# EAGLE board 74hc165 extension board (EAGLE 9.2.0)
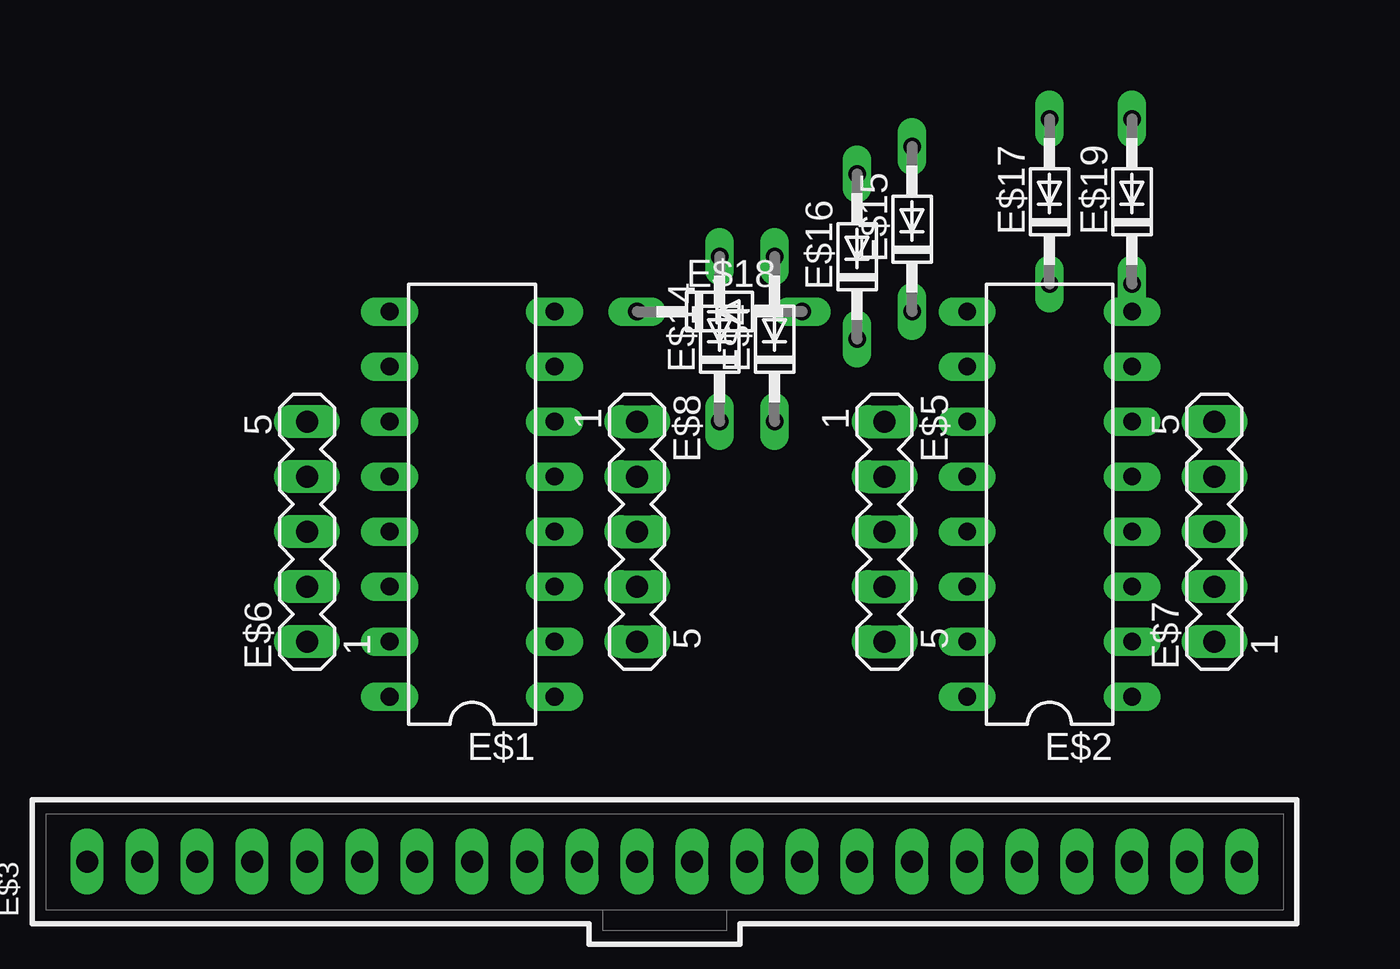
[diagram p0: board, top side]
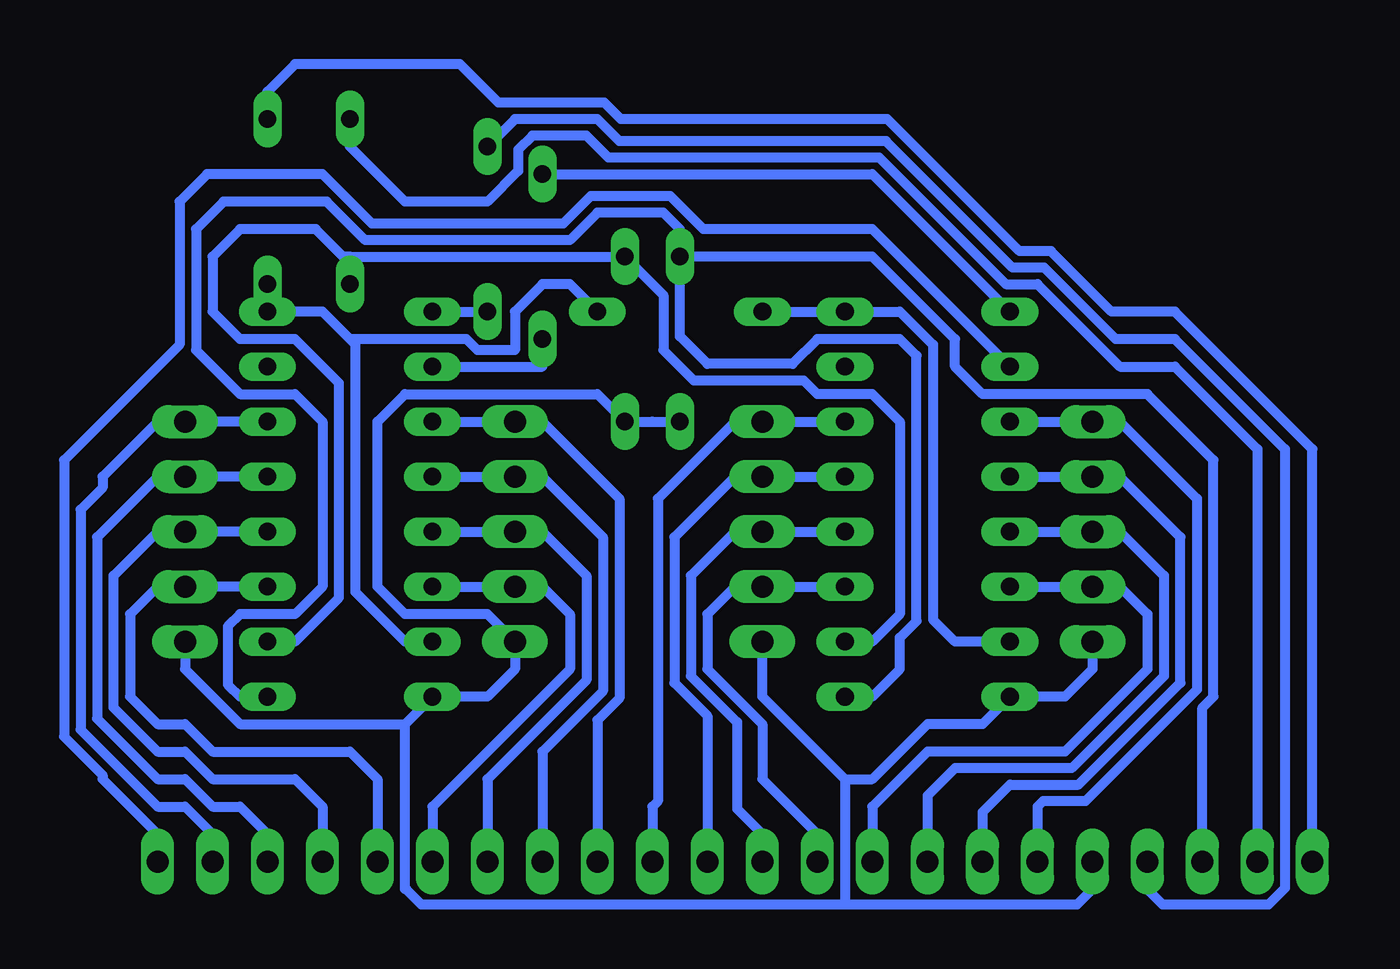
[diagram p1: board, bottom side, seen from below]

No outline drawn. Coordinates in mm, seen from the top.
Copper layers (1*16): Top 0.035mm / dielectric 1.5mm / Bottom 0.035mm
Design rules "default": minimum track width 6mil, minimum drill 0.35mm, track to track 6mil, track to pad 6mil, pad to pad 6mil, via to via 6mil, smd to smd 6mil, copper to edge 40mil, drill to drill 6mil, minimum pad ring 10mil, minimum via ring 8mil, stop-mask expansion 4mil, vias tented up to drill 0mil, thermal gap 10mil

## Footprints (pad centres in the part's own frame; a part is rotated, then mirrored left to right if it is on the bottom)
DIL16 = drill 0.813 long: 1 -8.89,-3.81; 2 -6.35,-3.81; 3 -3.81,-3.81; 4 -1.27,-3.81; 5 1.27,-3.81; 6 3.81,-3.81; 7 6.35,-3.81; 8 8.89,-3.81; 9 8.89,3.81; 10 6.35,3.81; 11 3.81,3.81; 12 1.27,3.81; 13 -1.27,3.81; 14 -3.81,3.81; 15 -6.35,3.81; 16 -8.89,3.81
70543-22 = drill 1.016 long: 1 -26.67,0; 2 -24.13,0; 3 -21.59,0; 4 -19.05,0; 5 -16.51,0; 6 -13.97,0; 7 -11.43,0; 8 -8.89,0; 9 -6.35,0; 10 -3.81,0; 11 -1.27,0; 12 1.27,0; 13 3.81,0; 14 6.35,0; 15 8.89,0; 16 11.43,0; 17 13.97,0; 18 16.51,0; 19 19.05,0; 20 21.59,0; 21 24.13,0; 22 26.67,0
DO34-7 = drill 0.813 long: A 3.81,0; C -3.81,0
MA05-1 = drill 1.016 long: 1 -5.08,0; 2 -2.54,0; 3 0,0; 4 2.54,0; 5 5.08,0

## Placement (x,y rotation side)
E$1  [DIL16]  35.56,57.15 90 top
E$2  [DIL16]  62.23,57.15 90 top
E$3  [70543-22]  44.45,40.64 0 top
E$4  [DO34-7]  49.53,64.77 90 top
E$5  [MA05-1]  54.61,55.88 270 top
E$6  [MA05-1]  27.94,55.88 90 top
E$7  [MA05-1]  69.85,55.88 90 top
E$8  [MA05-1]  43.18,55.88 270 top
E$14  [DO34-7]  46.99,64.77 90 top
E$15  [DO34-7]  55.88,69.85 90 top
E$16  [DO34-7]  53.34,68.58 90 top
E$17  [DO34-7]  62.23,71.12 90 top
E$18  [DO34-7]  46.99,66.04 0 top
E$19  [DO34-7]  66.04,71.12 90 top

## Library data of the parts
E$1 E$2 = 74xx-eu
E$3 = con-molex
E$4 E$14-E$19 = diode
E$5-E$8 = con-lstb

## Nets
S$1: E$2.6 E$3.21 E$7.5
S$2: E$2.5 E$3.20 E$7.4
S$3: E$2.4 E$3.19 E$7.3
S$4: E$2.3 E$3.18 E$7.2
S$5: E$2.14 E$3.17 E$5.4
S$6: E$2.13 E$3.16 E$5.3
S$7: E$2.12 E$3.15 E$5.2
S$8: E$2.11 E$3.14 E$5.1
S$9: E$1.6 E$3.13 E$8.1
S$10: E$1.5 E$3.12 E$8.2
S$11: E$1.4 E$3.11 E$8.3
S$12: E$1.3 E$3.10 E$8.4
S$13: E$1.14 E$3.9 E$6.2
S$14: E$1.13 E$3.8 E$6.3
S$15: E$1.12 E$3.7 E$6.4
S$16: E$1.11 E$3.6 E$6.5
S$17: E$1.8 E$1.15 E$18.C
S$18: E$2.8 E$2.15 E$18.A E$19.C
S$19: E$1.16 E$2.16 E$3.5 E$4.C E$5.5 E$6.1 E$7.1 E$8.5 E$14.C
S$20: E$1.2 E$2.2 E$4.A E$17.C
S$21: E$1.1 E$2.1 E$3.3 E$14.A
S$22: E$1.10 E$3.22
S$23: E$2.10 E$16.C
S$24: E$1.9 E$16.A
S$25: E$2.9 E$15.C
S$26: E$3.4 E$15.A
S$27: E$3.2 E$17.A
S$28: E$3.1 E$19.A

## Tracks (layer width: path | path; a pad name or v marks a point on that pad's centre or on a via)
S$1
  Bottom 0.457: E$2.6 E$7.5 71.12,60.96 73.66,58.42 73.66,57.91 74.68,56.9 74.68,46.74 71.12,43.18 69.85,43.18 68.58,41.91 E$3.21
S$2
  Bottom 0.457: E$2.5 E$7.4 71.12,58.42 73.91,55.63 73.91,47.24 71.12,44.45 69.85,44.45 68.58,43.18 67.31,43.18 66.04,41.91 E$3.20
S$3
  Bottom 0.457: E$2.4 E$7.3 71.12,55.88 73.15,53.85 73.15,47.75 71.12,45.72 69.85,45.72 68.58,44.45 64.77,44.45 63.5,43.18 E$3.19
S$4
  Bottom 0.457: E$2.3 E$7.2 71.12,53.34 72.39,52.07 72.39,48.26 71.12,46.99 69.85,46.99 68.58,45.72 62.23,45.72 60.96,44.45 E$3.18
S$5
  Bottom 0.457: E$2.14 E$5.4 53.34,53.34 52.07,52.07 52.07,49.53 58.42,43.18 E$3.17
S$6
  Bottom 0.457: E$2.13 E$5.3 53.34,55.88 51.31,53.85 51.31,49.02 55.88,44.45 E$3.16
S$7
  Bottom 0.457: E$2.12 E$5.2 53.34,58.42 50.55,55.63 50.55,48.51 53.34,45.72 E$3.15
S$8
  Bottom 0.457: E$2.11 E$5.1 53.34,60.96 49.78,57.4 49.78,48.2 50.8,47.18 E$3.14
S$9
  Bottom 0.457: E$1.6 E$8.1 44.45,60.96 48.01,57.4 48.01,43.43 48.26,43.18 E$3.13
S$10
  Bottom 0.457: E$1.5 E$8.2 44.45,58.42 47.24,55.63 47.24,48.9 45.72,47.38 E$3.12
S$11
  Bottom 0.457: E$1.4 E$8.3 44.45,55.88 46.48,53.85 46.48,49.21 44.35,47.09 44.35,43.08 43.18,41.91 E$3.11
S$12
  Bottom 0.457: E$1.3 E$8.4 44.45,53.34 45.72,52.07 45.72,49.53 43.18,46.99 43.18,44.45 40.64,41.91 E$3.10
S$13
  Bottom 0.457: E$1.14 E$6.2 26.67,53.34 25.4,52.07 25.4,49.53 29.21,45.72 35.56,45.72 38.1,43.18 E$3.9
S$14
  Bottom 0.457: E$1.13 E$6.3 26.67,55.88 24.64,53.85 24.64,49.21 28.89,44.96 34.29,44.96 35.56,43.69 E$3.8
S$15
  Bottom 0.457: E$1.12 E$6.4 26.67,58.42 23.88,55.63 23.88,48.9 28.58,44.2 31.75,44.2 33.02,42.93 E$3.7
S$16
  Bottom 0.457: E$1.11 E$6.5 26.67,60.96 23.11,57.4 23.11,48.58 28.26,43.43 30.23,43.43 30.48,43.18 E$3.6
S$17
  Bottom 0.457: E$1.15 34.29,50.8 35.31,51.82 35.31,64.52 36.83,66.04 E$1.8 E$18.C
S$18
  Bottom 0.457: E$2.15 59.69,50.8 61.98,53.09 61.98,64.52 62.23,64.77 | 62.23,64.77 63.5,66.04 E$2.8 E$19.C | E$18.A 52.07,67.31 53.34,67.31 54.61,66.04 54.61,64.26 56.34,64.26 56.85,64.77 62.23,64.77
S$19
  Bottom 0.457: E$7.1 69.85,49.53 67.31,46.99 59.69,46.99 | 59.69,46.99 E$2.16 55.88,48.26 54.61,49.53 E$5.5 55.88,52.07 59.69,52.07 60.96,53.34 60.96,60.96 59.69,62.23 50.8,62.23 E$4.C 48.26,60.96 E$14.C | E$3.5 27.94,39.37 28.65,38.66 39.37,38.66 | 59.69,46.99 59.69,39.37 59.64,39.37 58.92,38.66 39.37,38.66 | E$6.1 27.94,49.53 29.21,48.26 E$1.16 33.02,46.99 35.56,46.99 38.1,44.45 39.37,44.45 | E$8.5 43.18,48.26 39.37,44.45 | 39.37,44.45 39.37,38.66
S$20
  Bottom 0.457: E$2.2 64.77,50.8 62.74,52.83 62.74,62.74 64.77,64.77 67.31,64.77 68.58,66.04 68.58,68.58 67.31,69.85 63.82,69.85 62.55,68.58 62.23,68.58 | E$1.2 38.1,50.8 36.83,52.07 36.83,60.96 38.1,62.23 40.64,62.23 41.27,62.87 46.35,62.87 47.75,64.26 47.75,66.8 E$4.A 62.23,68.58 | E$17.C 62.23,68.58
S$21
  Bottom 0.457: E$1.1 38.1,48.26 36.83,49.53 36.83,50.99 36.07,51.75 36.07,64.01 36.83,64.77 40.64,64.77 41.78,63.63 45.72,63.63 46.99,64.9 E$14.A | E$2.1 67.31,48.26 67.87,48.82 67.87,51.51 67.31,52.07 64.77,52.07 63.5,53.34 63.5,60.96 64.77,62.23 67.31,62.23 69.34,64.26 69.34,69.85 68.07,71.12 63.31,71.12 61.53,69.34 52.07,69.34 50.8,70.61 47.75,70.61 46.99,69.85 E$14.A | E$3.3 22.86,47.76 22.35,48.27 22.35,59.18 25.4,62.23 33.02,62.23 34.29,63.5 34.29,64.77 38.1,68.58 E$14.A
S$22
  Bottom 0.457: E$1.10 38.1,69.85 45.91,69.85 47.44,71.37 51.12,71.37 52.39,70.1 61.21,70.1 63.5,72.39 68.83,72.39 70.1,71.12 70.1,64.52 75.44,59.18 75.44,46.42 73.66,44.64 73.66,44.45 71.12,41.91 E$3.22
S$23
  Bottom 0.457: E$2.10 53.34,63.5 E$16.C
S$24
  Bottom 0.457: E$16.A 38.1,72.39 E$1.9
S$25
  Bottom 0.457: E$2.9 E$15.C
S$26
  Bottom 0.457: E$15.A 54.61,74.93 50.8,74.93 49.78,73.91 37.47,73.91 31.63,68.07 30.16,68.07 26.86,64.77 24.13,64.77 19.05,59.69 19.05,39.42 19.82,38.66 24.69,38.66 25.4,39.37 E$3.4
S$27
  Bottom 0.457: E$3.2 20.32,59.69 24.13,63.5 26.67,63.5 30.48,67.31 31.94,67.31 37.78,73.15 50.29,73.15 51.31,74.17 53.8,74.17 54.46,73.51 54.46,72.54 55.88,71.12 59.69,71.12 62.23,73.66 E$17.A
S$28
  Bottom 0.457: E$3.1 17.78,59.69 24.13,66.04 27.05,66.04 29.85,68.83 31.31,68.83 37.41,74.93 49.72,74.93 50.48,75.69 55.37,75.69 57.15,77.47 64.77,77.47 66.04,76.2 E$19.A